# Altium PCB CH32F&V208C-R0-1v1.PcbDoc (part 2 of 2)
Units mil, origin at the board's own origin, x right, y up, seen from the top; angles counter-clockwise.
Board outline 2952.76 x 3346.46 mil, 2 copper layers (Top Layer, Bottom Layer); 50 components, 65 nets, 277 pads, 818 vias.
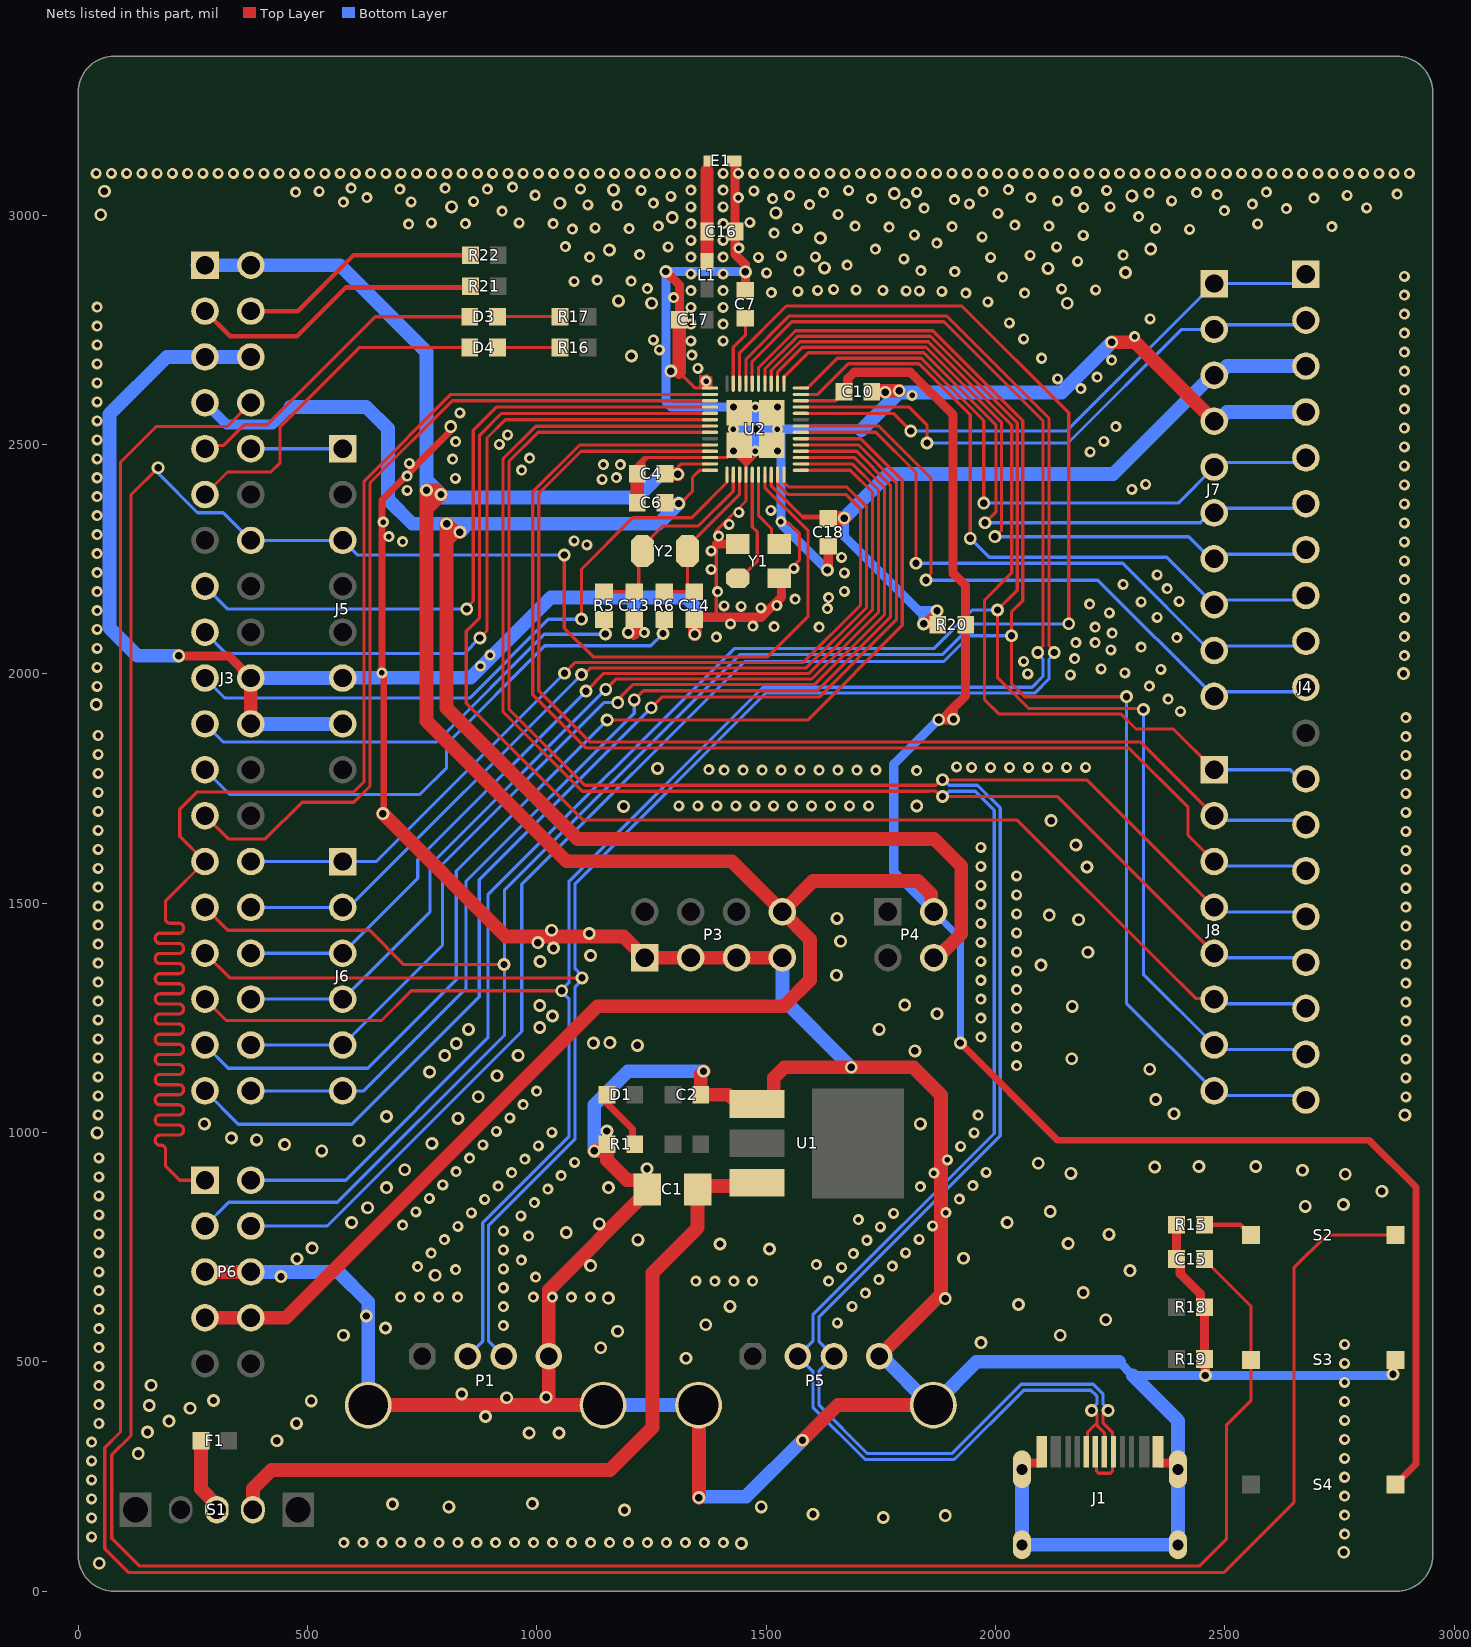
[diagram p2: the nets of this part, all layers, seen from the top]

## Via types
v1: diameter 24, hole 12, Top Layer to Bottom Layer, tented both sides, 587 vias
v2: diameter 28, hole 16, Top Layer to Bottom Layer, tented both sides, 231 vias

## Nets (pads, with @x,y where several pads share a name; then routed paths per layer and width w, separated by ;. In a path a pad name is that pad's centre, name@x,y a point inside that pad or via, vN(x,y) a via of type N, cw(c..) or ccw(c..) an arc to the next point about the centre after c; other vN are vias at no path point) (continued)
GND: C1.2 C2.2 C4.2 C6.2 C7.2 C10.1 C13.1 C14.1 C15.1 C16.1 C17.1 C18.2 E1.0 J1.0 J1.A1 J1.B1 J3.5 J3.6 J3.20 J3.22 J4.4 J5.6 J5.7 J7.4 P1.0 P1.4 P3.1 P3.3 P3.5 P3.7 P5.0 P5.4 P6.5 P6.6 R1.1 R15.1 R18.2 R19.2 S3.1 U1.1 U2.0 U2.4 U2.35 U2.46 Y1.2 Y1.4 | length 17099.1
  Top Layer w7: C6.2@1218.5,2363.24 C6.2@1218.5,2373.24 ; C4.2@1218.5,2436.24 1218.5,2440.5 1218.5,2456.61 1223.94,2462.06 ; C4.2@1221,2451 C4.2@1228,2451 ; C4.2@1223.98,2452 1223.94,2452.04 1223.94,2462.06 ; C4.2@1227,2449 1228,2450 C4.2@1228,2451 ; 1310.5,2657.87 1345.41,2622.97 U2.35@1377.4,2622.97 1378.69,2622.97 1378.73,2623.01 1378.73,2646.22 ; 1356.89,2625.78 1356.89,2648.98 ; U2.35@1361.79,2625.23 1361.79,2648.43 ; U2.35@1363.61,2625.23 v1@1363.61,2648.43 ; v1@1368.91,2626.74 v1(1368.91,2638.35) v1@1368.91,2649.95 ; U2.35@1372.51,2625.36 v1@1372.51,2648.57 ; 1391.13,2123.24 1391.13,2283.24 1391.13,2312.24 1455.71,2376.82 U2.4@1455.71,2434.24 ; U2.0@1437,2473 1447,2463 ; U2.4@1455.71,2434.24 1455.73,2453.73 1459.86,2457.86 ; 1474,2472 1464,2462 ; Y1.2@1528.69,2208.44 1532.62,2208.44 1572.13,2247.95 1572.13,2306.24 1549.56,2328.82 1538.33,2328.82 v1@1535.07,2332.07 ; 1223.94,2462.06 1233.29,2471.4 1241.4,2471.4 ; C4.2@1228,2451 1231.96,2451 1233,2452.04 1233,2463 ; C4.2@1228,2451 1228,2458 1233,2463 ; 1233,2463 1241.4,2471.4 ; 1241.4,2471.4 U2.46@1377.4,2471.4 1414.13,2471.4 U2.0@1440.9,2498.16 U2.0@1447,2492.06 ; 1447,2463 1451.35,2458.65 ; 1447,2463 U2.0@1447,2492.06 ; U2.0@1447,2492.06 U2.0@1451.35,2487.7 ; 1451.35,2458.65 1455.69,2454.31 U2.4@1455.71,2434.24 ; 1451.35,2458.65 U2.0@1451.35,2487.7 ; U2.0@1451.35,2487.7 U2.0@1455.71,2483.35 ; U2.4@1455.71,2434.24 U2.0@1455.71,2483.35 ; U2.0@1455.71,2483.35 U2.0@1459.86,2479.2 ; 1459.86,2457.86 1464,2462 ; 1459.86,2457.86 U2.0@1459.86,2479.2 ; U2.0@1459.86,2479.2 1464,2475.06 1464,2462
  Top Layer w15: v1(662.13,2002.24) 662.13,2379.24 812,2529.11 v2(812,2539) ; v2(664.13,1695.24) 666.13,1697.24 v1@666.13,2002.24
  Top Layer w20: v2(219.13,2039.24) 328.04,2039.24 J3.20@376.39,1990.89 ; v2(1281.13,2877.24) 1310.5,2847.87 C17.1@1310.5,2772.24 ; C14.1@1343.03,2118.54 1347.73,2123.24 1391.13,2123.24 1489.13,2123.24 1533.13,2167.24 1533.13,2203.99 Y1.2@1528.69,2208.44 ; 1391.13,2283.24 Y1.4@1438.13,2283.24 ; E1.0@1429.91,3118.24 1431.72,3116.43 1431.72,2953.4 1431.88,2953.24 1431.88,2914.95 1454.43,2892.4 v2(1454.43,2876.24) C7.2@1454.43,2835.87 ; v2(1633.13,2226.24) 1635.13,2228.24 C18.2@1635.13,2278.24 ; J1.0@2057.27,265.8 2057.27,270.6 2066.22,279.54 2098.57,279.54 2100.38,281.35 J1.A1@2100.38,303.99 J1.A1@2100.38,310.49 ; J1.B1@2354.31,303.99 2354.31,281.35 2356.13,279.54 2388.48,279.54 2397.43,270.6 J1.0@2397.43,265.8 ; R15.1@2394.5,799.24 C15.1@2394.5,724.24 2402.33,716.42 2402.33,692.05 2446.83,647.55 2446.83,627.55 R18.2@2455.13,619.24 R19.2@2455.13,506.24 2457.13,504.24 v2(2457.13,470.24) ; v2(2866.13,473.24) 2867.66,474.77 2867.66,500.77 S3.1@2871.38,504.49
  Top Layer w30: P6.5@276.39,696.24 P6.6@376.39,696.24 ; J3.22@376.39,1890.89 J3.20@376.39,1990.89 ; P1.0@632.32,406 934,406 1020.13,406 ; v2(664.13,1695.24) 932.13,1427.24 1036,1427.24 1189.13,1427.24 P3.1@1235.13,1381.24 P3.3@1335.13,1381.24 P3.5@1435.13,1381.24 P3.7@1535.13,1381.24 ; v2(1125,960) 1136.26,960 1151.5,975.24 R1.1@1152.5,974.24 1152.5,939.87 1196.13,896.24 1225.13,896.24 1240.13,881.24 C1.2@1240.13,876.24 1240.13,871.24 1026.02,657.13 P1.4@1026.02,512.3 1026.02,411.89 1020.13,406 ; P1.0@1144.13,406 1020.13,406 ; v2@1211.13,2090.24 1211.13,2117.78 C13.1@1211.9,2118.54 ; C6.2@1218.5,2373.24 C4.2@1218.5,2436.24 ; C4.2@1218.5,2440.5 C4.2@1220,2442 ; 1310.5,2657.87 C17.1@1310.5,2772.24 ; C14.1@1343.03,2118.54 1344.13,2117.44 v2(1344.13,2086.24) ; P5.0@1352.32,406 1353.13,405.19 v2(1353.13,204.24) ; v2(1363.07,1133.63) 1357.13,1127.69 C2.2@1357.13,1082.24 1417.56,1082.24 1422.56,1077.24 1465.13,1077.24 U1.1@1480.13,1062.24 ; U1.1@1503.45,1064.24 1516.45,1077.24 1516.45,1119.56 1539.13,1142.24 v2(1685.13,1142.24) 1821.13,1142.24 1881.13,1082.24 1881.13,940.65 1881.13,911.41 1881.13,825.65 1881.13,647.41 P5.4@1746.02,512.3 ; v2(1579.13,329.24) 1655.89,406 P5.0@1864.13,406 ; C10.1@1727.83,2615.84 1729.63,2614.04 1732.59,2617 v2(1790,2617) ; v2(2252.93,2722.74) 2304.54,2722.74 J7.4@2476.39,2550.89
  Bottom Layer w20: U2.0@1428.38,2485.41 v1(1428.38,2533.41) ; v2(1454.43,2876.24) 1453.43,2877.24 v2(1281.13,2877.24) 1281.13,2593.12 1292.85,2581.41 U2.0@1428.38,2581.41 v1(1428.38,2533.41) ; v1(1476.38,2485.41) U2.0@1476.38,2533.41 ; v1(1476.38,2581.41) U2.0@1476.38,2533.41 ; U2.0@1524.38,2485.41 v1@1524.38,2532.32 ; U2.0@1524.38,2581.41 v1(1524.38,2533.41) ; v1@1532.07,2533.41 1705.17,2533.41 1707.33,2531.24 ; v2(1633.13,2226.24) 1532.84,2326.54 1532.84,2331.3 v1(1532.07,2332.07) 1532.07,2524.63 v1@1524.38,2532.32 ; 2269.13,500.24 2299.13,470.24 v2(2457.13,470.24) 2863.13,470.24 v2(2866.13,473.24) ; v1(1428.38,2533.41) U2.0@1476.38,2533.41 ; U2.0@1476.38,2533.41 v1(1524.38,2533.41) ; v1@1524.38,2532.32 v1(1524.38,2533.41)
  Bottom Layer w30: v2(219.13,2039.24) 129.13,2039.24 68.13,2100.24 68.13,2138.06 68.13,2344.79 68.13,2566.13 192.89,2690.89 J3.5@276.39,2690.89 J3.6@376.39,2690.89 ; P6.6@376.39,696.24 567.13,696.24 632.32,631.06 P1.0@632.32,406 ; J3.22@376.39,1890.89 J5.7@576.39,1890.89 ; J3.20@376.39,1990.89 J5.6@576.39,1990.89 577,1991.5 855.39,1991.5 1030.13,2166.24 1211.13,2166.24 ; v2(1125,960) 1125,1060.44 1198.19,1133.63 v2(1363.07,1133.63) ; P1.0@1144.13,406 P5.0@1352.32,406 ; v2@1211.13,2090.24 1211.13,2166.24 ; v2(1344.13,2086.24) 1344.13,2147.24 1334.12,2157.26 1325.13,2166.24 1211.13,2166.24 ; v2(1353.13,204.24) 1355.13,206.24 1456.13,206.24 v2(1579.13,329.24) ; P3.7@1535.13,1381.24 1535.13,1292.24 v2(1685.13,1142.24) ; 1707.33,2531.24 v2@1789.53,2613.44 ; P5.4@1746.02,512.3 1751.93,512.3 1858.23,406 P5.0@1864.13,406 1958.38,500.24 2269.13,500.24 ; v2(1790,2617) 1789.53,2616.53 v2@1789.53,2613.44 ; J1.0@2057.27,265.8 J1.0@2057.27,101.24 J1.0@2397.43,101.24 J1.0@2397.43,265.8 2397.43,371.95 2299.13,470.24 ; v2(2252.93,2722.74) 2143.63,2613.44 v2@1789.53,2613.44 ; J7.4@2481.73,2551.64 2485.27,2551.64 2504.51,2570.89 J4.4@2676.39,2570.89
  other v1: 579.41,106.18 620.75,106.18 662.1,106.18 703.44,106.18 744.79,106.18 786.13,106.18 827.48,106.18 868.83,106.18 910.17,106.18 951.52,106.18 992.86,106.18 1034.21,106.18 1075.55,106.18 1116.9,106.18 1158.25,106.18 1199.59,106.18 1240.94,106.18 1282.28,106.18 1323.63,106.18 1364.97,106.18 1406.32,106.18 29.18,118.68 2761,124.54 29.18,160.03 2761,165.89 29.18,201.37 2761,207.23 29.18,242.72 2761,248.58 29.18,284.06 2761,289.93 29.18,325.41 2761,331.27 45.18,365.75 2761,372.62 45.18,407.1 2761,413.96 45.18,448.45 2761,455.31 45.18,489.79 2761,496.65 45.18,531.14 2761,538 45.18,572.48 927,579 1655,585 45.18,613.83 927,620.35 1687,621 703,641 744.35,641 785.69,641 827.04,641 992.42,641 1033.77,641 1075.11,641 1116.46,641 1716.24,650.24 45.18,655.17 927,661.69 1346.41,676.18 1387.75,676.18 1429.1,676.18 1470.44,676.18 1635.83,676.18 1745.47,679.47 997,685 45.18,696.52 823,701 927,703.04 1664,706 740,708 1774.71,708.71 1609,712 966,722 1690,736 769.24,737.24 45.18,737.87 1803.94,737.94 927,744.38 1719.24,765.24 798.47,766.47 1833.18,767.18 982,774 45.18,779.21 927,785.73 1748.47,794.47 827.71,795.71 1862.41,796.41 707,798 1701,810 965.24,818.24 45.18,820.56 1777.71,823.71 856.94,824.94 1891.65,825.65 736.24,827.24 994.47,847.47 886.18,854.18 1920.89,854.89 765.47,856.47 45.18,861.9 1023.71,876.71 1836.18,882.18 915.41,883.41 1950.12,884.12 794.71,885.71 45.18,903.25 1052.94,905.94 1865.41,911.41 944.65,912.65 1979.36,913.36 823.94,914.94 1082.18,935.18 1894.65,940.65 973.89,941.89 45.18,944.59 853.18,944.18 1923.89,969.89 1003.12,971.12 882.41,973.41 1953.12,999.12 1032.36,1000.36 911.65,1002.65 940.89,1031.89 43.18,1038.68 1962,1038 970.12,1061.12 2894.12,1077.8 43.18,1080.03 999.36,1090.36 2894.12,1119.15 43.18,1121.37 2046,1146 2894.12,1160.49 43.18,1162.72 2046,1187.35 2894.12,1201.84 43.18,1204.06 1968,1208 2046,1228.69 2894.12,1243.19 43.18,1245.41 1968,1249.35 2046,1270.04 2894.12,1284.53 43.18,1286.75 1968,1290.69 2046,1311.38 2894.12,1325.88 43.18,1328.1 1968,1332.04 2046,1352.73 2894.12,1367.22 43.18,1369.45 1968,1373.38 2046,1394.07 2894.12,1408.57 43.18,1410.79 1968,1414.73 2046,1435.42 2894.12,1449.91 43.18,1452.14 1968,1456.07 2046,1476.77 2894.12,1491.26 43.18,1493.48 1968,1497.42 2046,1518.11 2894.12,1532.61 43.18,1534.83 1968,1538.77 2046,1559.46 2894.12,1573.95 43.18,1576.17 1968,1580.11 2894.12,1615.3 43.18,1617.52 1968,1621.46 2894.12,1656.64 43.18,1658.87 2894.12,1697.99 43.18,1700.21 1309.54,1712 1350.89,1712 1392.23,1712 1433.58,1712 1474.93,1712 1516.27,1712 1557.62,1712 1598.96,1712 1640.31,1712 1681.65,1712 1723,1712 2894.12,1739.33 43.18,1741.56 2894.12,1780.68 43.18,1782.9 1828,1789 1408.23,1790 1449.58,1790 1490.93,1790 1532.27,1790 1573.62,1790 1614.96,1790 1656.31,1790 1697.65,1790 1739,1790 1375,1791 1947.89,1796 1989.23,1796 2030.58,1796 2071.93,1796 2113.27,1796 2154.62,1796 2195.96,1796 1915,1797 2894.12,1822.03 43.18,1824.25 2894.12,1863.37 43.18,1865.59 2894.12,1904.72 2403,1918 2376,1945 41.18,1972.68 2335,1973 2163,1998 2070,2000 2282,2002 2360,2010 2230,2011 41.18,2014.03 877,2017 2061,2027 2172,2033 2891.12,2039.8 898,2041 2251,2052 41.18,2055.37 2317,2058 2175,2068 2217,2068 2395,2079 1391,2080 2891.12,2081.15 2254,2089 1234,2090 41.18,2096.72 1615,2102 2217,2102 1517,2103 1471,2104 1422,2109 2891.12,2122.49 2352,2123 2248,2133 41.18,2138.06 1633,2142 1488,2144 1445,2147 1408,2148 1523,2149 2205,2152 2317,2157 2400,2158 1563,2163 2891.12,2163.84 1636,2166 41.18,2179.41 1394,2179 1670,2180 2374,2186 2278,2195 2891.12,2205.19 2352,2216 1670,2220 41.18,2220.75 1380,2228 1560,2230 2891.12,2246.53 1664.02,2253.77 41.18,2262.1 1380,2268 1109,2281 707,2288 2891.12,2287.88 1081,2290 677,2299 1396,2300 41.18,2303.45 1419,2326 2891.12,2329.22 665,2331 41.18,2344.79 1440,2352 1510.23,2356.24 2891.12,2370.57 41.18,2386.14 717,2400 2297,2402 2891.12,2411.91 2327,2413 1142,2424 822,2426 41.18,2427.48 1173,2428 717,2431 966.76,2444 2891.12,2453.26 1145,2456 1182,2456 722,2459 816,2468 41.18,2468.83 984,2470.24 2206,2484 2891.12,2494.61 918,2500 823,2506 2236,2507 41.18,2510.17 936,2521 2891.12,2535.95 2262,2539 41.18,2551.52 832,2569 2891.12,2577.3 41.18,2592.87 1818,2607 2891.12,2618.64 2186,2622 41.18,2634.21 2135,2643 2221,2647 2891.12,2659.99 1351,2666 41.18,2675.56 2253,2684 2100,2688 1338,2695 2891.12,2701.33 1267,2706 41.18,2716.9 1335.68,2726 1406,2726 1254,2728 2061,2730 2303,2735 2891.12,2742.68 41.18,2758.25 1335.68,2762.5 1406,2762.5 2030,2765 2337,2774 2891.12,2784.03 41.18,2799.59 1335.68,2799 1406,2799 1983,2811 1298,2820 2891.12,2825.37 1935,2830 2063,2830 1511,2831 1569,2834 1883,2834 1335.68,2835.5 1406,2835.5 1805,2835 1834,2835 1612,2836 1754,2836 1696,2837 2217.87,2837.08 1647,2838 2143.87,2839.08 1241,2840 1081.14,2855.34 1205.14,2856.34 1131.14,2858.34 2015,2865 2891.12,2866.72 1335.68,2872 1406,2872 1501,2874 1910.87,2877.08 1571,2878 1836.87,2879.08 1676,2891 2178.87,2899.08 1799.73,2904.74 1115.14,2908.34 1335.68,2908.5 1406,2908.5 1483,2908 1989,2908 1607,2909 1533,2911 2074.97,2912.32 2277.73,2912.74 1224,2914 1737.73,2925.74 1440,2928 1062.24,2931.59 1286,2931 2133,2931 1871.87,2939.08 1335.68,2945 1406,2945 1970.73,2952.74 1822.73,2956.74 2191,2956 1517,2961 1077.14,2969.34 2422.87,2969.08 1201.14,2970.34 1568,2971 2348.87,2971.08 1127.14,2972.34 1767.87,2974.08 1905,2975 2732.87,2975.08 1265,2976 1693.87,2976.08 2115.87,2976.08 2041.87,2978.08 720.14,2980.34 844.14,2981.34 1035.14,2981.34 1335.68,2981.5 1406,2981.5 2571,2981 770.14,2983.34 961.14,2983.34 1464.1,2984.24 2311.73,2996.74 1656.73,3001.74 2004.73,3003.74 924,3009 2498.87,3010.08 2634,3014 1843.87,3015.08 2808.87,3016.08 2191.87,3017.08 2249.73,3017.74 1335.68,3018 1406,3018 1175,3021 1111.14,3022.34 1594.73,3022.74 2559.73,3023.74 1942.73,3024.74 1803,3025 1254,3026 578.14,3028.34 726,3029 862,3030 2135,3031 2383.87,3031.08 1910,3034 1514,3036 1728.87,3036.08 2693.87,3037.08 629.14,3038.34 1439,3038 2076.87,3038.08 1292,3041 996.14,3043.34 1551,3043 2766,3043 2482.73,3044.74 2875,3046 2334.73,3048.74 1624.97,3049.32 1827.73,3049.74 2438,3049 474,3050 2589.97,3050.32 525.24,3051.59 1972.97,3051.32 2175.73,3051.74 1473,3053 1679.73,3053.74 1227,3054 1335.68,3054.5 1406,3054.5 2242,3054 2027.73,3055.74 701.24,3056.59 892.24,3056.59 1095,3057 595,3059 800,3059 947,3061 39.21,3091 72.46,3091 105.7,3091 138.94,3091 172.19,3091 205.43,3091 238.67,3091 271.91,3091 305.16,3091 338.4,3091 371.64,3091 404.89,3091 438.13,3091 471.37,3091 504.61,3091 537.86,3091 571.1,3091 604.34,3091 637.59,3091 670.83,3091 704.07,3091 737.31,3091 770.56,3091 803.8,3091 837.04,3091 870.28,3091 903.53,3091 936.77,3091 970.01,3091 1003.26,3091 1036.5,3091 1069.74,3091 1102.98,3091 1136.23,3091 1169.47,3091 1202.71,3091 1235.96,3091 1269.2,3091 1302.44,3091 1335.68,3091 1406,3091 1439.24,3091 1472.49,3091 1505.73,3091 1538.97,3091 1572.21,3091 1605.46,3091 1638.7,3091 1671.94,3091 1705.19,3091 1738.43,3091 1771.67,3091 1804.91,3091 1838.16,3091 1871.4,3091 1904.64,3091 1937.88,3091 1971.13,3091 2004.37,3091 2037.61,3091 2070.86,3091 2104.1,3091 2137.34,3091 2170.58,3091 2203.83,3091 2237.07,3091 2270.31,3091 2303.56,3091 2336.8,3091 2370.04,3091 2403.28,3091 2436.53,3091 2469.77,3091 2503.01,3091 2536.26,3091 2569.5,3091 2602.74,3091 2635.98,3091 2669.23,3091 2702.47,3091 2735.71,3091 2768.95,3091 2802.2,3091 2835.44,3091 2868.68,3091 2901.93,3091
  other v2: 46,61 2759,85.2 1445.67,104.18 1755,161 1890,165 1602,168 1191,177 808,184 1489,184 685,190 990,191 131,300 433,328 983,345 1048,345 151,347 476,366 198,371 888,381 244,399 155,405 508,415 295,416 934,422 1020,423 836,430 159,449 1325,508 1139,531 1968,542 578,558 2141,558 1176,567 670,574 1368,581 2240,592 628,600 1421,621 2050,625 1890,638 1155.8,639 2191,651 442,686 778,689 2293,699 1117,710 477,725 1930,726 1507,746 510,748 1399,757 2158,758 1220,766 2247,778 1064,782 1136,801 596,804 2025,804 2119,828 631,836 2675,839 2758,843 2842,872 672,880 1156,880 2762,909 2164,911 2669,918 712,919 1240.13,921.24 2347,925 2443,926 2567,926 2093,933 531,960 450,974 771,976 612,982 389,984 334,988 41.18,999.33 1152.5,1003.54 275,1019 1836,1019 828,1031 672,1035 2892.12,1038.46 2389,1041 2349,1072 872,1078 913,1124 766,1132 2336,1138 2166,1161 799,1168 959,1168 1824,1178 1219,1190 824,1194 1123,1195 1159,1196 851,1225 1746,1225 1006,1229 1034,1254 1872,1259 2167,1275 1006,1277 1802,1278 1653,1343 2099,1365 1007,1373 1117,1386 2201,1393 1036,1402 1002,1414 1662,1417 1114,1434 1032,1441 2181,1464 1654,1467 2117,1474 2199,1579 2175,1627 2121,1680 1189,1711 1828,1712 1263,1794 39.18,1933.33 2889.12,2000.46 1199.13,2090.24 1759.38,2614.04 1292,2660 1206,2693 1250,2808 2156,2808 1178,2813 2283,2875 2114,2884 1627,2885 1158,2924 2338,2926 1618,2950 1295,2995 49,3001 1521,3005 814,3018 1050,3026 2297,3042 1779,3047 57,3052 1167,3055
KEY: J3.8 S2.1 | length 6160
  Top Layer w7: J3.8@376.39,2590.89 324.75,2539.24 170.13,2539.24 92.13,2461.24 92.13,2275.24 92.13,347.24 58,313.11 58,92.38 109.13,41.24 2498.13,41.24 2650.13,193.24 2650.13,705.24 2721.38,776.49 S2.1@2871.38,776.49
LED1: D3.2 J3.9 | length 696.1
  Top Layer w7: J3.9@276.39,2490.89 283.39,2497.89 316.89,2497.89 362,2543 412,2543 647.24,2778.24 707,2778.24 D3.2@853.5,2778.24
LED2: D4.2 J3.11 | length 756.1
  Top Layer w7: J3.11@276.39,2390.89 325.5,2440 420,2440 440,2460 440,2539 612.24,2711.24 D4.2@853.5,2711.24
NetC16_2: C16.2 E1.1 L1.2 | length 196.2
  Top Layer w28.1: L1.2@1371.15,2898.87 C16.2@1371.13,2961.87 ; C16.2@1371.17,2964.24 1371.17,3097.49
NetD1_2: D1.2 R1.2 | length 133.1
  Top Layer w15: D1.2@1152.5,1082.24 1152.5,1062.87 1208.13,1007.25 1208.13,979.25 R1.2@1213.13,974.24
NetD3_1: D3.1 R17.2 | length 137.2
  Top Layer w7: D3.1@914.13,2778.24 915.13,2779.24 1049.5,2779.24 R17.2@1050.5,2778.24
NetD4_1: D4.1 R16.2 | length 136.4
  Top Layer w7: D4.1@914.13,2711.24 R16.2@1050.5,2711.24
NetF1_2: F1.2 S1.1 | length 164.3
  Top Layer w30: F1.2@267.5,328 267.5,222.58 302.13,187.95 S1.1@302.13,178
NetJ3_3: J3.3 R21.2 | length 646.5
  Top Layer w10: J3.3@276.39,2790.89 331.28,2736 477,2736 583.24,2842.24 851.88,2842.24 R21.2@854.88,2845.24
NetJ3_4: J3.4 R22.1 | length 528.8
  Top Layer w10: J3.4@376.39,2790.89 478.89,2790.89 600.24,2912.24 R22.1@854.88,2912.24
NetJ3_10: J3.10 J5.1 | length 200
  Bottom Layer w8: J3.10@376.39,2490.89 J5.1@576.39,2490.89
NetR15_2: R15.2 S2.2 | length 110.7
  Top Layer w10: R15.2@2455.13,799.24 2533.66,799.24 S2.2@2556.42,776.49
NRST: C15.2 J3.14 J5.3 S3.2 U2.7 | length 7602.5
  Top Layer w7: v2(174.13,2449.24) 115.13,2390.24 115.13,339.24 73.13,297.24 73.13,115.24 133.13,55.24 2445.13,55.24 2503.13,113.24 2503.13,362.24 2556.42,415.53 S3.2@2556.42,504.49 2556.42,621.98 2455.13,723.26 C15.2@2455.13,724.24 ; v2(1059.63,2259.24) 1059.63,2099.74 1122.38,2037 1502.89,2037 1591.13,2125.24 1591.13,2311.87 1497.05,2405.95 U2.7@1497.05,2434.24
  Bottom Layer w7: v2(174.13,2449.24) 174.13,2437.28 260.03,2351.39 315.89,2351.39 J3.14@376.39,2290.89 J5.3@576.39,2290.89 608.04,2259.24 v2(1059.63,2259.24)
PA0: J3.28 J6.1 U2.9 | length 1994.1
  Top Layer w7: v2(1060.13,2001.24) 1083.89,2025 1580.58,2025 1705.63,2150.05 1705.63,2358.74 1673.13,2391.24 1546.76,2391.24 1524.62,2413.38 U2.9@1524.61,2434.24
  Bottom Layer w7: J3.28@376.39,1590.89 J6.1@576.39,1590.89 649.78,1590.89 v2(1060.13,2001.24)
PA1: J3.30 J6.2 U2.10 | length 2052.9
  Top Layer w7: v2(1097.13,1998.24) 1102.27,1998.24 1117.03,2013 1586.97,2013 1718.63,2144.67 1718.63,2364.13 1675.52,2407.24 1548.76,2407.24 1538.4,2417.6 U2.10@1538.39,2434.24
  Bottom Layer w7: J3.30@376.39,1490.89 J6.2@577.78,1490.89 ; J6.2@576.39,1490.89 589.78,1490.89 v2(1097.13,1998.24)
PA2: J3.32 J6.3 U2.11 | length 2121.5
  Top Layer w7: v2(1107.13,1962.24) 1145.89,2001 1593.35,2001 1731.63,2139.28 1731.63,2395.44 1683.23,2443.84 U2.11@1575.35,2443.84
  Bottom Layer w7: J3.32@376.39,1390.89 J6.3@576.39,1390.89 740.13,1554.63 740.13,1595.24 v2(1107.13,1962.24)
PA3: J3.34 J6.4 U2.12 | length 2236.7
  Top Layer w7: v2(1150.13,1966.24) 1172.89,1989 1599.74,1989 1744.63,2133.9 1744.63,2400.82 1687.84,2457.62 U2.12@1575.35,2457.62
  Bottom Layer w7: J3.34@376.39,1290.89 J6.4@576.39,1290.89 767.13,1481.63 767.13,1583.24 v2(1150.13,1966.24)
PA4: J3.36 J6.5 U2.13 | length 2363.6
  Top Layer w7: v2(1176.13,1937.24) 1176.13,1943.31 1209.83,1977 1606.12,1977 1757.63,2128.51 1757.63,2406.21 1692.44,2471.4 U2.13@1575.35,2471.4
  Bottom Layer w7: J3.36@376.39,1190.89 J6.5@576.39,1190.89 794.13,1408.63 794.13,1585.24 1146.13,1937.24 v2(1176.13,1937.24)
PA5: J3.38 J6.6 U2.14 | length 2490.1
  Top Layer w7: v2(1212.13,1943.24) 1232.13,1963.24 1610.75,1963.24 1770.63,2123.13 1770.63,2411.59 1697.05,2485.18 U2.14@1575.35,2485.18
  Bottom Layer w7: J3.38@376.39,1090.89 J6.6@576.39,1090.89 622.78,1090.89 845.13,1313.24 845.13,1547.24 1212.13,1914.24 v2(1212.13,1943.24)
PA6: J3.37 U2.15 | length 2683.6
  Top Layer w7: v2(1249.13,1926.24) 1272.13,1949.24 1615.13,1949.24 1783.63,2117.74 1783.63,2416.97 1701.65,2498.96 U2.15@1575.35,2498.96
  Bottom Layer w7: J3.37@276.39,1090.89 349.04,1018.24 596.13,1018.24 874.13,1296.24 874.13,1551.24 v2(1249.13,1926.24)
PA7: J3.35 U2.16 | length 2655.3
  Top Layer w7: v2(1153.13,1899.24) 1590.13,1899.24 1796.63,2105.74 1796.63,2422.36 1706.26,2512.74 U2.16@1575.35,2512.74
  Bottom Layer w7: J3.35@276.39,1190.89 327.04,1140.24 631.13,1140.24 824.13,1333.24 824.13,1570.24 v2(1153.13,1899.24)
PA8: J4.12 J8.1 U2.27 | length 2049.7
  Top Layer w7: U2.27@1510.83,2632.57 1510.83,2661.38 1573.59,2724.14 1853.12,2724.14 2035.13,2542.13 2035.13,2220.34 1975.63,2160.84 1975.63,1943.97 2006.96,1912.64 2273.02,1912.64 2305.92,1879.74 2387.54,1879.74 J8.1@2476.39,1790.89
  Bottom Layer w7: J8.1@2476.39,1790.89 2642.05,1790.89 2658.89,1774.04 J4.12@2677.63,1774.04
PA9: J4.18 J8.7 P6.2 U2.28 | length 4934
  Top Layer w7: U2.28@1497.05,2632.57 1497.05,2664.57 1568.62,2736.14 1858.09,2736.14 2047.13,2547.1 2047.13,2182.44 v2(2003.93,2139.24) 2003.93,1992.37 2071.66,1924.64 2319.73,1924.64 v2(2322.13,1922.24)
  Bottom Layer w7: P6.2@376.39,896.24 583.13,896.24 893.13,1206.24 893.13,1518.24 1429.83,2054.94 1864.94,2054.94 1949.24,2139.24 v2(2003.93,2139.24) ; v2(2322.13,1922.24) 2322.13,1345.15 J8.7@2476.39,1190.89 2486.39,1180.89 2655.59,1180.89 J4.18@2669.93,1166.54
PA10: J4.19 J8.8 P6.4 U2.29 | length 5093.8
  Top Layer w7: U2.29@1483.27,2632.57 1483.27,2667.76 1563.65,2748.14 1863.06,2748.14 2059.13,2552.07 2059.13,2159.54 2034.53,2134.94 v2(2034.53,2083.04) 2034.53,1978.74 2063.03,1950.24 v2(2285.13,1950.24)
  Bottom Layer w7: P6.4@376.39,796.24 543.13,796.24 967.13,1220.24 967.13,1541.3 1452.77,2026.94 1886.94,2026.94 1943.04,2083.04 v2(2034.53,2083.04) ; v2(2285.13,1950.24) 2285.13,1282.15 J8.8@2476.39,1090.89 2486.39,1080.89 2673.89,1080.89 J4.19@2675.93,1078.84
PA11: J3.33 P1.2 U2.30 | length 4557.2
  Top Layer w7: J3.33@276.39,1290.89 323.04,1244.24 661.13,1244.24 726.13,1309.24 v2(1054.13,1309.24) ; U2.30@1469.49,2632.57 1469.49,2646.76 1469.1,2647.15 1469.1,2680.98 1555.46,2767.34 1887.43,2767.34 2103.33,2551.44 2103.33,2061.13 2091.83,2049.63 v2(2091.83,2046.53)
  Bottom Layer w7: P1.2@848.86,512.3 881.73,545.17 881.73,803.7 1070.13,992.11 1070.13,1290.6 1054.13,1306.6 v2(1054.13,1309.24) 1054.13,1311.89 1070.13,1327.89 1070.13,1548.24 1492.83,1970.94 2015.55,1970.94 2079.53,1970.94 2103.33,1994.74 2103.33,2031.93 2091.83,2043.43 v2(2091.83,2046.53)
PA12: J3.31 P1.3 U2.31 | length 4621.9
  Top Layer w7: J3.31@276.39,1390.89 330.04,1337.24 v2(1098.13,1337.24) ; U2.31@1455.71,2632.57 1455.71,2646.76 1456.1,2647.15 1456.1,2686.36 1550.08,2780.34 1892.82,2780.34 2116.33,2556.83 2116.33,2061.13 2127.83,2049.63 v2(2127.83,2046.53) v2@2125.42,2046.53
  Bottom Layer w7: P1.3@927.6,512.3 894.73,545.17 894.73,798.32 1083.13,986.73 1083.13,1317.6 1098.13,1332.6 v2(1098.13,1337.24) 1098.13,1341.89 1083.13,1356.89 1083.13,1542.86 1498.22,1957.94 2020.93,1957.94 2084.92,1957.94 2116.33,1989.36 2116.33,2031.93 2127.83,2043.43 v2(2127.83,2046.53)
PA13: J3.29 P6.3 U2.32 | length 4700.3
  Top Layer w7: J3.29@276.39,1490.89 326.04,1441.24 635.13,1441.24 710.13,1366.24 v2(928.13,1366.24) ; U2.32@1441.93,2632.57 1441.93,2699.94 1543.93,2801.94 1926.43,2801.94 2159.23,2569.14 v2(2159.23,2109.24)
  Bottom Layer w7: P6.3@276.39,796.24 328.39,848.24 565.13,848.24 929.63,1212.74 929.63,1364.74 v2(928.13,1366.24) 929.63,1367.74 929.63,1529.74 1441.83,2041.94 1883.56,2041.94 1950.16,2108.54 2158.53,2108.54 v2(2159.23,2109.24)
PA14: J3.27 P6.1 U2.36 | length 4003.9
  Top Layer w7: P6.1@276.39,896.24 221.13,896.24 190.61,926.77 190.61,959.04 190.61,962.54 ccw(c180.71,962.54) 180.71,972.44 178.05,972.44 cw(c178.05,982.34) 168.15,982.34 168.15,984.54 cw(c178.05,984.54) 178.05,994.44 219.57,994.44 ccw(c219.57,1004.34) 229.47,1004.34 229.47,1006.54 ccw(c219.57,1006.54) 219.57,1016.44 178.05,1016.44 cw(c178.05,1026.34) 168.15,1026.34 168.15,1028.54 cw(c178.05,1028.54) 178.05,1038.44 219.57,1038.44 ccw(c219.57,1048.34) 229.47,1048.34 229.47,1050.54 ccw(c219.57,1050.54) 219.57,1060.44 178.05,1060.44 cw(c178.05,1070.34) 168.15,1070.34 168.15,1072.54 cw(c178.05,1072.54) 178.05,1082.44 219.57,1082.44 ccw(c219.57,1092.34) 229.47,1092.34 229.47,1094.54 ccw(c219.57,1094.54) 219.57,1104.44 178.05,1104.44 cw(c178.05,1114.34) 168.15,1114.34 168.15,1116.54 cw(c178.05,1116.54) 178.05,1126.44 219.57,1126.44 ccw(c219.57,1136.34) 229.47,1136.34 229.47,1138.54 ccw(c219.57,1138.54) 219.57,1148.44 178.05,1148.44 cw(c178.05,1158.34) 168.15,1158.34 168.15,1160.54 cw(c178.05,1160.54) 178.05,1170.44 219.57,1170.44 ccw(c219.57,1180.34) 229.47,1180.34 229.47,1182.54 ccw(c219.57,1182.54) 219.57,1192.44 178.05,1192.44 cw(c178.05,1202.34) 168.15,1202.34 168.15,1204.54 cw(c178.05,1204.54) 178.05,1214.44 219.57,1214.44 ccw(c219.57,1224.34) 229.47,1224.34 229.47,1226.54 ccw(c219.57,1226.54) 219.57,1236.44 178.05,1236.44 cw(c178.05,1246.34) 168.15,1246.34 168.15,1248.54 cw(c178.05,1248.54) 178.05,1258.44 219.57,1258.44 ccw(c219.57,1268.34) 229.47,1268.34 229.47,1270.54 ccw(c219.57,1270.54) 219.57,1280.44 178.05,1280.44 cw(c178.05,1290.34) 168.15,1290.34 168.15,1292.54 cw(c178.05,1292.54) 178.05,1302.44 219.57,1302.44 ccw(c219.57,1312.34) 229.47,1312.34 229.47,1314.54 ccw(c219.57,1314.54) 219.57,1324.44 178.05,1324.44 cw(c178.05,1334.34) 168.15,1334.34 168.15,1336.54 cw(c178.05,1336.54) 178.05,1346.44 219.57,1346.44 ccw(c219.57,1356.34) 229.47,1356.34 229.47,1358.54 ccw(c219.57,1358.54) 219.57,1368.44 178.05,1368.44 cw(c178.05,1378.34) 168.15,1378.34 168.15,1380.54 cw(c178.05,1380.54) 178.05,1390.44 219.57,1390.44 ccw(c219.57,1400.34) 229.47,1400.34 229.47,1402.54 ccw(c219.57,1402.54) 219.57,1412.44 178.05,1412.44 cw(c178.05,1422.34) 168.15,1422.34 168.15,1424.54 cw(c178.05,1424.54) 178.05,1434.44 219.57,1434.44 ccw(c219.57,1444.34) 229.47,1444.34 229.47,1446.54 ccw(c219.57,1446.54) 219.57,1456.44 200.03,1456.44 cw(c200.03,1466.34) 190.13,1466.34 190.13,1504.63 196.39,1510.89 J3.27@276.39,1590.89 221.13,1646.15 221.13,1705.24 258.13,1742.24 600.13,1742.24 623.13,1765.24 623.13,2420.21 812.11,2609.19 U2.36@1377.4,2609.19
PA15: J3.25 U2.37 | length 1904.8
  Top Layer w7: J3.25@276.39,1690.89 327.04,1640.24 408.13,1640.24 488.13,1720.24 601.13,1720.24 636.13,1755.24 636.13,2416.24 815.3,2595.41 U2.37@1377.4,2595.41
PB0: J4.9 J7.9 U2.17 | length 1419
  Top Layer w7: U2.17@1575.35,2526.52 1738.86,2526.52 1826.43,2438.94 v2(1826.43,2241.24)
  Bottom Layer w7: v2(1826.43,2241.24) 2276.75,2241.24 2471.75,2046.24 J7.9@2476.39,2050.89 2486.39,2060.89 2654.68,2060.89 J4.9@2668.03,2074.24
PB1: J4.10 J7.10 U2.18 | length 1499
  Top Layer w7: U2.18@1575.35,2540.3 1745.21,2540.3 1859.13,2426.37 1859.13,2218.84 1848.13,2207.84 v2(1848.13,2204.24)
  Bottom Layer w7: v2(1848.13,2204.24) 2223.04,2204.24 J7.10@2476.39,1950.89 2486.39,1960.89 2665.88,1960.89 J4.10@2676.13,1971.14
PB3: J3.15 U2.38 | length 1524.2
  Top Layer w7: v2(847.13,2141.24) 847.13,2144.98 861,2158.84 861,2531 911.63,2581.63 U2.38@1377.4,2581.63
  Bottom Layer w7: J3.15@276.39,2190.89 326.04,2141.24 v2(847.13,2141.24)
PB4: J4.17 J8.6 U2.39 | length 3227.5
  Top Layer w7: U2.39@1377.4,2567.85 922.85,2567.85 875,2520 875,2122.11 846.13,2093.24 846.13,1936.24 1101.13,1681.24 2047.13,1681.24 2364.13,1364.24 2435.89,1292.49 2474.79,1292.49 J8.6@2476.39,1290.89
  Bottom Layer w7: J8.6@2476.39,1290.89 2486.39,1280.89 2663.69,1280.89 J4.17@2678.23,1266.34
PB5: J3.17 U2.40 | length 1577.8
  Top Layer w7: v2(875.63,2078.24) 875.63,2078.74 891.13,2094.24 891.13,2514.13 931.07,2554.07 U2.40@1377.4,2554.07
  Bottom Layer w7: J3.17@276.39,2090.89 323.04,2044.24 841.63,2044.24 v2(875.63,2078.24)
PB6: J1.A7 J1.B7 J4.16 J8.5 P5.2 U2.41 | length 5571.1
  Top Layer w7: U2.41@1377.4,2540.3 1363.2,2540.3 1362.81,2539.91 997.41,2539.91 926.13,2468.63 926.13,2419.04 926.13,1917.24 1090.23,1753.14 1099.13,1744.24 1854.38,1744.24 1854.5,1744.37 1869.54,1744.37 1881.18,1732.73 v2(1884.14,1732.73) 2134.55,1732.73 J8.5@2476.39,1390.89 ; J1.B7@2197.82,303.99 2200.22,306.4 2200.22,346.33 2220.79,366.9 ; 2220.79,386.21 2220.79,366.9 ; J1.A7@2237.19,303.99 2237.19,345.19 2220.79,361.59 2220.79,366.9
  Bottom Layer w7: v2(1884.14,1732.73) 1887.22,1732.73 1898.74,1744.24 1955.13,1744.24 1997,1702.38 1997,998 1601.73,602.73 1601.73,545.17 P5.2@1568.86,512.3 1601.73,479.43 1601.73,400.86 1715.34,287.24 1910.13,287.24 2061.13,438.24 2207.75,438.24 2217.94,428.05 2220.78,425.21 2220.78,408.85 2209.27,397.34 v2(2209.27,394.25) ; J8.5@2476.39,1390.89 2486.39,1380.89 2662.59,1380.89 J4.16@2677.73,1365.74
PB7: J1.A6 J1.B6 J4.15 J8.4 P5.3 U2.42 | length 5570.2
  Top Layer w7: U2.42@1377.4,2526.52 1363.2,2526.52 1362.81,2526.91 1002.8,2526.91 939.13,2463.24 939.13,1922.63 1104.52,1757.24 1848.99,1757.24 1849.12,1757.37 1869.59,1757.37 1880.99,1768.76 2198.52,1768.76 J8.4@2476.39,1490.89 ; J1.A6@2217.5,303.99 2219.91,301.59 2219.91,261.47 2224.13,257.24 2250.13,257.24 2254.47,261.58 2254.47,301.59 J1.B6@2256.87,303.99 2254.47,306.4 2254.47,346.91 2233.79,367.59 2233.79,387.24 2240.79,394.24 v2(2245.29,394.24)
  Bottom Layer w7: v2@1884.14,1768.76 1887.22,1768.76 1898.74,1757.24 1960.52,1757.24 2010,1707.76 2010,992.62 1614.73,597.34 1614.73,545.17 P5.3@1647.6,512.3 1614.73,479.43 1614.73,406.24 1720.73,300.24 1904.75,300.24 2055.75,451.24 2213.13,451.24 2233.78,430.6 2233.78,408.84 2245.29,397.34 v2(2245.29,394.24) ; J8.4@2476.39,1490.89 2486.39,1480.89 2656.09,1480.89 J4.15@2659.13,1477.84
  other v2: 1884.19,1768.98
PB8: J4.14 J8.3 U2.44 | length 2748.4
  Top Layer w7: U2.44@1377.4,2498.96 1092.96,2498.96 991.13,2397.13 991.13,1954.24 1107.13,1838.24 2229.04,1838.24 2290.76,1838.24 2419.64,1709.36 2419.64,1647.64 J8.3@2476.39,1590.89
  Bottom Layer w7: J8.3@2476.39,1590.89 2486.39,1580.89 2664.29,1580.89 J4.14@2673.53,1571.64
PB9: J4.13 J8.2 U2.45 | length 2640.2
  Top Layer w7: U2.45@1377.4,2485.18 1096.15,2485.18 1004.13,2393.16 1004.13,1963.24 1116.13,1851.24 2316.04,1851.24 J8.2@2476.39,1690.89
  Bottom Layer w7: J8.2@2476.39,1690.89 2486.39,1680.89 2671.29,1680.89 J4.13@2681.73,1670.44
PB10: J4.1 J7.1 U2.20 | length 1258.3
  Top Layer w7: U2.20@1575.35,2567.85 1776.52,2567.85 v2(1814.83,2529.54)
  Bottom Layer w7: v2(1814.83,2529.54) 2155.05,2529.54 J7.1@2476.39,2850.89 2656.39,2850.89 J4.1@2676.39,2870.89
PB11: J4.2 J7.2 U2.21 | length 1267.5
  Top Layer w7: U2.21@1575.35,2581.63 1811.34,2581.63 1850.23,2542.74 v2(1850.23,2503.24)
  Bottom Layer w7: v2(1850.23,2503.24) 2157.83,2503.24 2405.48,2750.89 J7.2@2476.39,2750.89 2486.39,2760.89 2666.39,2760.89 J4.2@2676.39,2770.89
PB12: J4.8 J7.8 U2.23 | length 1518.2
  Top Layer w7: U2.23@1575.35,2609.19 1612.05,2609.19 1679,2676.14 1833.23,2676.14 1944.73,2564.64 1944.73,2350.88 v2(1944.73,2295.24)
  Bottom Layer w7: v2(1944.73,2295.24) 1985.73,2254.24 2373.04,2254.24 J7.8@2476.39,2150.89 2486.39,2160.89 2665.58,2160.89 J4.8@2680.23,2175.54
PB13: J4.5 J7.5 U2.24 | length 1405.9
  Top Layer w7: U2.24@1575.38,2623 1589.56,2623 1654.7,2688.14 1838.2,2688.14 1974.13,2552.21 v2(1974.13,2372.24)
  Bottom Layer w7: v2(1974.13,2372.24) 2397.75,2372.24 J7.5@2476.39,2450.89 2486.39,2460.89 2668.48,2460.89 J4.5@2677.53,2469.94
PB14: J4.6 J7.6 U2.25 | length 1509.7
  Top Layer w7: U2.25@1538.41,2632.6 1538.41,2646.77 1591.79,2700.14 1843.18,2700.14 2000.93,2542.39 2000.93,2353.64 v2(1976.73,2329.44)
  Bottom Layer w7: v2(1976.73,2329.44) 2446.36,2329.44 2467.8,2350.89 J7.6@2476.39,2350.89 2486.39,2360.89 2670.48,2360.89 J4.6@2681.63,2372.04
PB15: J4.7 J7.7 U2.26 | length 1569.2
  Top Layer w7: U2.26@1524.61,2632.57 1524.61,2658.19 1578.56,2712.14 1848.15,2712.14 2012.93,2547.36 2012.93,2313.54 v2(1998.43,2299.04)
  Bottom Layer w7: v2(1998.43,2299.04) 2420.64,2299.04 2468.79,2250.89 J7.7@2476.39,2250.89 2486.39,2260.89 2660.28,2260.89 J4.7@2677.53,2278.14
PC13: J3.19 U2.1 | length 1431.4
  Top Layer w7: v2(1097.13,2119.24) 1097.13,2228.13 1209.24,2340.24 1337.13,2340.24 1414.35,2417.46 U2.1@1414.37,2434.24
  Bottom Layer w7: J3.19@276.39,1990.89 320.04,1947.24 853.13,1947.24 1025.13,2119.24 v2(1097.13,2119.24)
PC14: J3.21 R5.1 | length 1019.6
  Top Layer w7: R5.1@1146.33,2118.54 1149.13,2115.74 v2(1149.13,2086.74)
  Bottom Layer w7: J3.21@276.39,1890.89 315.89,1851.39 781.28,1851.39 1016.13,2086.24 1148.63,2086.24 v2(1149.13,2086.74)
PC15: J3.23 R6.1 | length 1228.4
  Top Layer w7: v2(1275,2088) 1275,2116.08 R6.1@1277.47,2118.54
  Bottom Layer w7: J3.23@276.39,1790.89 330.28,1737 745,1737 803,1795 803,1847.11 1017.13,2061.24 1248.24,2061.24 v2(1275,2088)
V5V: C1.1 S1.2 U1.3 | length 1667.8
  Top Layer w30: S1.2@380.87,178 380.87,223.98 421.13,264.24 1159.13,264.24 1252.13,357.24 1252.13,694.24 1350.13,792.24 C1.1@1350.13,876.24 1357.13,883.24 1473.13,883.24 U1.3@1480.13,890.24
VBAT: C6.1 J3.7 P4.4 U2.48 | length 3438.6
  Top Layer w7: C6.1@1279.13,2373.24 1281.13,2371.24 v2(1309.13,2371.24) ; v2@1312.13,2371.24 1339.13,2398.24 1339.13,2428.24 1354.73,2443.84 U2.48@1377.4,2443.84
  Top Layer w30: v2(832,2309) v2@821.38,2309 ; C6.1@1279.13,2373.24 C6.1@1281.13,2371.24 ; P4.4@1865.13,1381.24 1873.25,1381.24 1925,1432.99 1925,1581.38 1866.13,1640.24 1088.13,1640.24 803.13,1925.24 803.13,2291 ; 803.13,2291 v2(803.13,2327.24) v2@821.38,2309 ; 803.13,2291 821.13,2309 v2@821.38,2309
  Bottom Layer w22: J3.7@276.39,2590.89 323.39,2543.89 423.89,2543.89 462,2582
  Bottom Layer w30: 462,2582 628,2582 675.13,2534.87 675.13,2380.24 728.13,2327.24 v2(803.13,2327.24) v2@813.76,2327.24 ; v2(1309.13,2371.24) 1265.13,2327.24 850.24,2327.24 ; v2@813.76,2327.24 850.24,2327.24 ; v2@813.76,2327.24 v2(832,2309) 850.24,2327.24
VDD: C4.1 C10.2 J3.1 J3.2 P3.8 P4.2 P6.7 P6.8 R20.1 S4.1 U2.22 U2.47 | length 9145.9
  Top Layer w7: v2@1299.88,2442.5 1314.99,2457.62 U2.47@1377.4,2457.62 ; U2.22@1575.35,2595.41 1650.29,2595.41 1669.13,2614.26 C10.2@1669.13,2615.24
  Top Layer w15: v2(1923.13,1195.24) 2135.13,983.24 2814.13,983.24 2916.13,881.24 2916.13,277.24 S4.1@2871.38,232.49
  Top Layer w20: C10.2@1669.13,2615.24 1677.44,2623.55 1677.44,2643.45 1691.63,2657.64 1814.03,2657.64 1907.22,2564.46 1907.22,2219.46 1934.63,2192.04 R20.1@1934.63,2107 1934.63,1952.5 1908.13,1926 ; v2(1876,1900) 1882.13,1900 1908.13,1926 ; v2@1883,1900 1907.02,1900 v2(1908.13,1901.11) 1908.13,1926
  Top Layer w30: P6.7@276.39,596.24 P6.8@376.39,596.24 453.13,596.24 1132.13,1275.24 1538.13,1275.24 1595.13,1332.24 1595.13,1421.24 P3.8@1535.13,1481.24 ; C4.1@1281.12,2435.24 v2(1307.13,2435.24) ; P4.2@1865.13,1481.24 1859.39,1486.98 1859.39,1519.98 1831.13,1548.24 1602.13,1548.24 P3.8@1535.13,1481.24 ; 759.13,2359.13 v2(759.13,2400.24) 781.76,2400.24 v2(791,2391) 759.13,2359.13 ; 759.13,2359.13 759.13,1897.24 1065.13,1591.24 1425.13,1591.24 P3.8@1535.13,1481.24
  Bottom Layer w15: P4.2@1865.13,1481.24 1923.13,1423.24 v2(1923.13,1195.24)
  Bottom Layer w20: P4.2@1865.13,1481.24 1777.83,1568.54 1777.83,1802.94 1876,1901.11 v2(1908.13,1901.11)
  Bottom Layer w30: J3.1@259.9,2890.89 J3.2@376.39,2890.89 570.11,2890.89 759.13,2701.87 759.13,2423.11 ; v2(1307.13,2435.24) 1269.13,2435.24 1218.13,2384.24 v2@798,2384.24 ; 759.13,2423.11 v2@798,2384.24 ; 759.13,2423.11 v2(759.13,2400.24) 775.13,2384.24 v2@798,2384.24
VDDA: C18.1 J4.3 J7.3 R20.2 U2.8 | length 1874.8
  Top Layer w7: U2.8@1510.83,2434.24 1510.83,2410.17 1577.5,2343.5 ; C18.1@1628,2345 1626.5,2343.5 1577.5,2343.5 ; C18.1@1635.13,2338.87 1634.5,2339.51 1581.49,2339.51 1577.5,2343.5
  Top Layer w20: v2@1871.34,2136.41 1871.34,2134.24 1846.09,2109 v2(1843,2109) 1844,2108 1873,2108 R20.2@1874,2107
  Top Layer w30: C18.1@1635.13,2338.87 1636.14,2339.88 1669.5,2339.88 v2(1669.91,2339.47)
  Bottom Layer w20: v2(1669.91,2339.47) 1669.91,2300.09 1832.06,2137.94 ; v2@1850,2120 1841.47,2128.53 ; 1832.06,2137.94 1841.47,2128.53 ; 1832.06,2137.94 1869.81,2137.94 1871.34,2136.41 1843.93,2109 v2(1843,2109) 1841.47,2110.53 1841.47,2128.53
  Bottom Layer w30: v2(1669.91,2339.47) 1765.98,2435.54 2256.43,2435.54 2471.78,2650.89 J7.3@2476.39,2650.89 2484.51,2650.89 2504.51,2670.89 J4.3@2676.39,2670.89
  other v2: 1872.34,2137.41
VINTA: C7.1 U2.33 | length 153.6
  Top Layer w7: U2.33@1428.15,2632.57 1428.15,2712.15 1454.43,2738.43 C7.1@1454.43,2775.24
X32IN: C13.2 R5.2 U2.2 Y2.1 | length 460
  Top Layer w7: R5.2@1139.33,2179.17 1207.33,2179.17 1222.13,2193.98 1222.13,2259.87 Y2.1@1229.71,2267.45 1229.71,2277.45 1274.51,2322.24 1352.13,2322.24 1428.15,2398.26 U2.2@1428.15,2434.24
X32OUT: C14.2 R6.2 U2.3 Y2.2 | length 376.1
  Top Layer w7: R6.2@1275.13,2179.17 1342.94,2179.17 1328.13,2193.98 1328.13,2277.45 1441.93,2391.24 U2.3@1441.93,2434.24
XIN: U2.5 Y1.1 | length 250.7
  Top Layer w7: Y1.1@1438.13,2208.44 1443.33,2208.44 1480.13,2245.24 1480.13,2309.47 1469.49,2320.12 U2.5@1469.49,2434.24
XOUT: U2.6 Y1.3 | length 169.8
  Top Layer w7: U2.6@1483.27,2434.24 1483.27,2344.73 1511.13,2316.87 1511.13,2300.8 Y1.3@1528.69,2283.24
pads on no net: J1.A8 J1.B8 J3.26 J4.11 S1.0 S1.3 U1.

## Polygon pours and split planes (outlines as drawn)
GND on Bottom Layer "GND" (hatched Horizontal grid 8 track 8, remove dead copper, pour order 1): 78.74,3346.46 ccw(c78.74,3267.72) 0,3267.72 0,78.74 ccw(c78.74,78.74) 78.74,0 2874.02,0 ccw(c2874.02,78.74) 2952.76,78.74 2952.76,3267.72 ccw(c2874.02,3267.72) 2874.02,3346.46
GND on Top Layer "GND" (hatched Horizontal grid 8 track 8, remove dead copper, pour order 0): 78.74,3346.46 2874.02,3346.46 cw(c2874.02,3267.72) 2952.76,3267.72 2952.76,78.74 cw(c2874.02,78.74) 2874.02,0 78.74,0 cw(c78.74,78.74) 0,78.74 0,3267.72 cw(c78.74,3267.72)

## Keep-outs
Keep-Out Layer:
  the board outline again, w10

## Other copper
Top Layer:
  rectangle net GND: 1412.47,3080.53 1447.9,3116.43
  rectangle net GND: 1413,2470 1540,2597
  rectangle net GND: 1411,2806 1522,2872
  rectangle net GND: 1263,2739 1344,2810
  rectangle net GND: 1400,2928 1482,3001
  rectangle net GND: 1398.16,3080 1475,3106.28
  pour cut-out: 1351,2897 1351,2838 1391,2838 1391,2897
Bottom Layer:
  rectangle net GND: 1393,2437 1579,2620
Multi-Layer:
  pour cut-out: 2952.74,3102.28 0,3102.28 0,3346.46 2952.76,3346.46

## Silkscreen, mask and mechanical layers (free items; w line width, h text height)
Top Overlay:
  lines w10: 436.39,1090.89 516.39,1090.89 ; 436.39,1190.89 516.39,1190.89 ; 436.39,1290.89 516.39,1290.89 ; 436.39,1390.89 516.39,1390.89 ; 436.39,1490.89 516.39,1490.89 ; 436.39,1590.89 516.39,1590.89 ; 436.39,1790.89 516.39,1790.89 ; 436.39,1890.89 516.39,1890.89 ; 436.39,1990.89 516.39,1990.89 ; 436.39,2090.89 516.39,2090.89 ; 436.39,2190.89 516.39,2190.89 ; 436.39,2290.89 516.39,2290.89 ; 436.39,2390.89 516.39,2390.89 ; 436.39,2490.89 516.39,2490.89 ; 2536.39,1084.89 2615.99,1076.93 ; 2536.39,1184.89 2615.99,1176.93 ; 2536.39,1284.89 2615.99,1276.93 ; 2536.39,1384.89 2615.99,1376.93 ; 2536.39,1484.89 2615.99,1476.93 ; 2536.39,1584.89 2615.99,1576.93 ; 2536.39,1684.89 2615.99,1676.93 ; 2536.39,1784.89 2615.99,1776.93 ; 2536.39,1956.89 2615.99,1964.85 ; 2536.39,2056.89 2615.99,2064.85 ; 2536.39,2156.89 2615.99,2164.85 ; 2536.39,2256.89 2615.99,2264.85 ; 2536.39,2356.89 2615.99,2364.85 ; 2536.39,2456.89 2615.99,2464.85 ; 2536.39,2556.89 2615.99,2564.85 ; 2536.39,2656.89 2615.99,2664.85 ; 2536.39,2756.89 2615.99,2764.85 ; 2536.39,2856.89 2615.99,2864.85
  text "VDD" at 111.99,2874.24 h35
  text "VDD" at 444.13,2874.24 h35
  text "PB10" at 2755,2853 h35
  text "BOOT1" at 53.67,2774.35 h35
  text "BOOT0" at 444.13,2774.35 h35
  text "PB11" at 2755,2753.22 h35
  text "GND" at 111.99,2674.45 h35
  text "GND" at 444.13,2674.45 h35
  text "VDDA" at 2755,2653.44 h35
  text "VBAT" at 77,2574.66 h35
  text "KEY" at 444.13,2574.66 h35
  text "GND" at 2755,2553.67 h35
  text "LED1" at 88.66,2474.56 h35
  text "PB13" at 2755,2453.89 h35
  text "3V3" at 654.13,2374.88 h35
  text "LED2" at 77,2374.66 h35
  text "PB14" at 2755,2354.11 h35
  text "PB2" at 110.29,2274.98 h35
  text "NRST" at 654.13,2274.98 h35
  text "PB15" at 2755,2254.33 h35
  text "PB3" at 110.29,2175.09 h35
  text "3V3" at 654.13,2175.09 h35
  text "PB12" at 2755,2154.56 h35
  text "PB5" at 110.29,2075.19 h35
  text "+5V" at 654.13,2075.19 h35
  text "PB0" at 2755,2054.78 h35
  text "PC13" at 81.13,1975.3 h35
  text "GND" at 654.13,1975.3 h35
  text "PB1" at 2755,1955 h35
  text "PC14" at 81.13,1875.4 h35
  text "GND" at 654.13,1875.4 h35
  text "CH32F&V208C-R0-1v1" at 1168.49,1802 h40
  text "PC15" at 81.13,1775.51 h35
  text "+5V" at 654.13,1775.51 h35
  text "PA8" at 2755,1754 h35
  text "PA15" at 81.13,1675.61 h35
  text "PB9" at 2755,1653.71 h35
  text "PA14" at 81.13,1575.72 h35
  text "PA0" at 654.13,1573.24 h35
  text "+5V" at 1254,1555 h35 r90
  text "+5V" at 1354,1555 h35 r90
  text "3V3" at 1454,1555 h35 r90
  text "VDD" at 1554,1555 h35 r90
  text "3V3" at 1783,1555 h35 r90
  text "VDD" at 1883,1555 h35 r90
  text "PB8" at 2755,1553.43 h35
  text "PA13" at 81.13,1475.82 h35
  text "PA1" at 654.13,1473.84 h35
  text "PB7" at 2755,1453.14 h35
  text "PA12" at 81.13,1375.93 h35
  text "PA2" at 654.13,1374.44 h35
  text "PB6" at 2755,1352.86 h35
  text "PA11" at 92.8,1276.03 h35
  text "PA3" at 654.13,1275.04 h35
  text "PB4" at 2755,1252.57 h35
  text "GND" at 1254,1215.99 h35 r90
  text "GND" at 1354,1215.99 h35 r90
  text "GND" at 1454,1215.99 h35 r90
  text "GND" at 1554,1215.99 h35 r90
  text "3V3" at 1783,1215.99 h35 r90
  text "VBAT" at 1883,1181 h35 r90
  text "PA7" at 110.29,1176.14 h35
  text "PA4" at 654.13,1175.64 h35
  text "PA9" at 2755,1152.29 h35
  text "PA6" at 110.29,1076.24 h35
  text "PA5" at 654.13,1076.24 h35
  text "PA10" at 2755,1052 h35
  text "SWCK" at 75.3,879.24 h35
  text "TXD" at 448.65,879.24 h35
  text "SWIO" at 81.13,780.74 h35
  text "RXD" at 448.65,780.74 h35
  text "GND" at 110.29,682.24 h35
  text "GND" at 448.65,682.24 h35
  text "VDD" at 110.29,583.74 h35
  text "VDD" at 448.65,583.74 h35
  text "+5V" at 110.29,485.24 h35
  text "+5V" at 448.65,485.24 h35
  text "OFF" at 188.13,32.24 h35
  text "ON" at 348.13,32.24 h35
Mechanical 1:
  the board outline again, w10

## Text inside footprints (layer, text, board x,y; h text height)
D1: Top Overlay "+" at 1195.13,1152.24 h40 r270
D3: Top Overlay "+" at 952.21,2789.23 h40 r270
D4: Top Overlay "+" at 952.21,2722.23 h40 r270
P1: Top Overlay "G" at 1010.43,392.3 h40; Top Overlay "V" at 730.43,392.3 h40; Top Overlay "D+" at 900.43,392.3 h40; Top Overlay "D-" at 810.43,392.3 h40
P5: Top Overlay "G" at 1730.43,392.3 h40; Top Overlay "V" at 1450.43,392.3 h40; Top Overlay "D+" at 1620.43,392.3 h40; Top Overlay "D-" at 1530.43,392.3 h40